# Altium PCB SmartTokens.PcbDoc
Units mm, origin at the board's own origin, x right, y up, seen from the top; angles counter-clockwise.
Board outline 22 x 21.98 mm, 4 copper layers (Component Side, Ground Plane, Power Plane, Solder Side), stack 1.1 mm thick; 43 components, 36 nets, 166 pads, 41 vias.
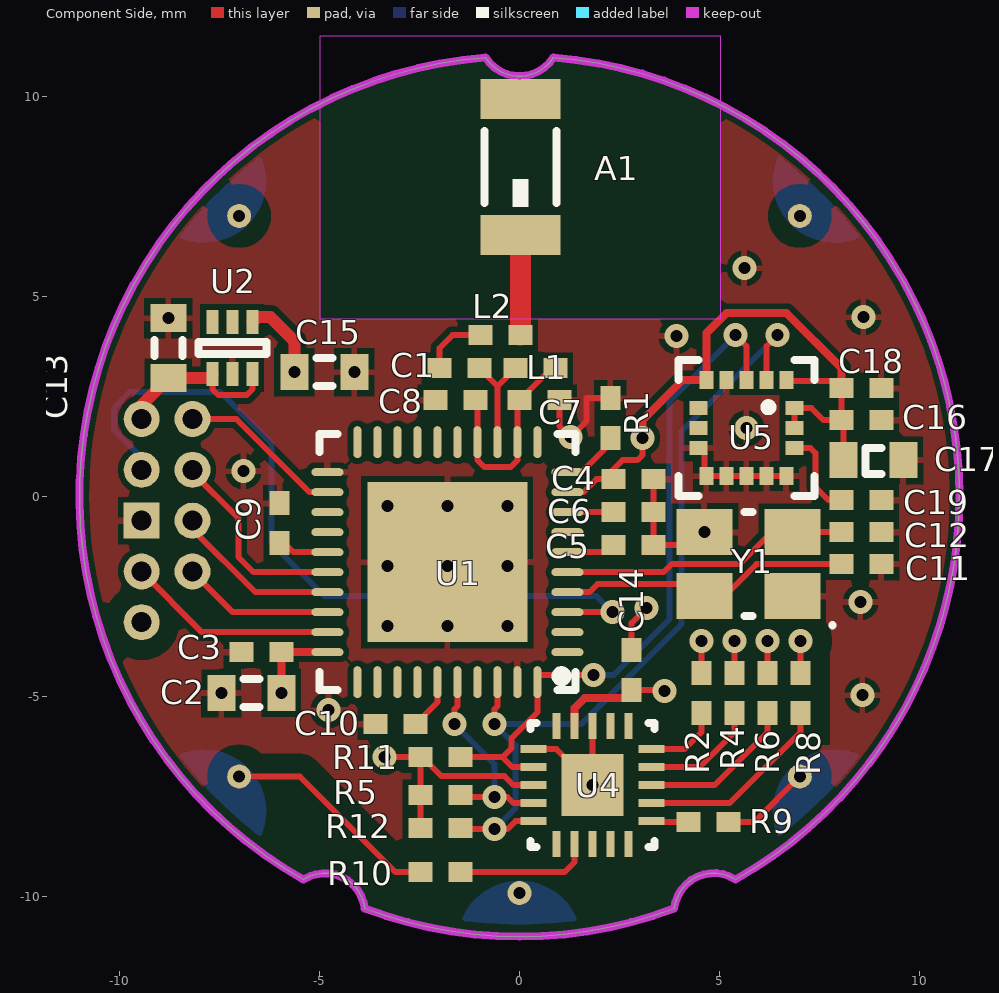
[diagram p0: Component Side view]
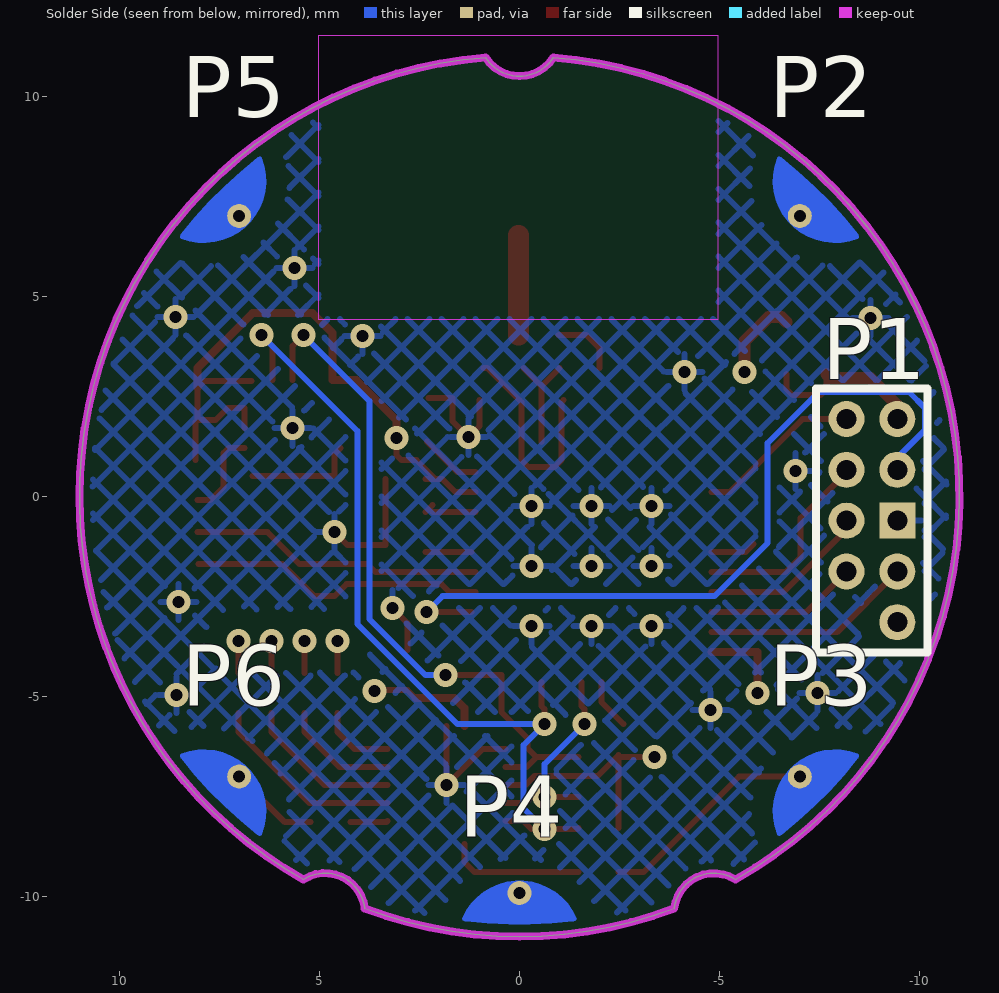
[diagram p1: Solder Side view, seen from below]
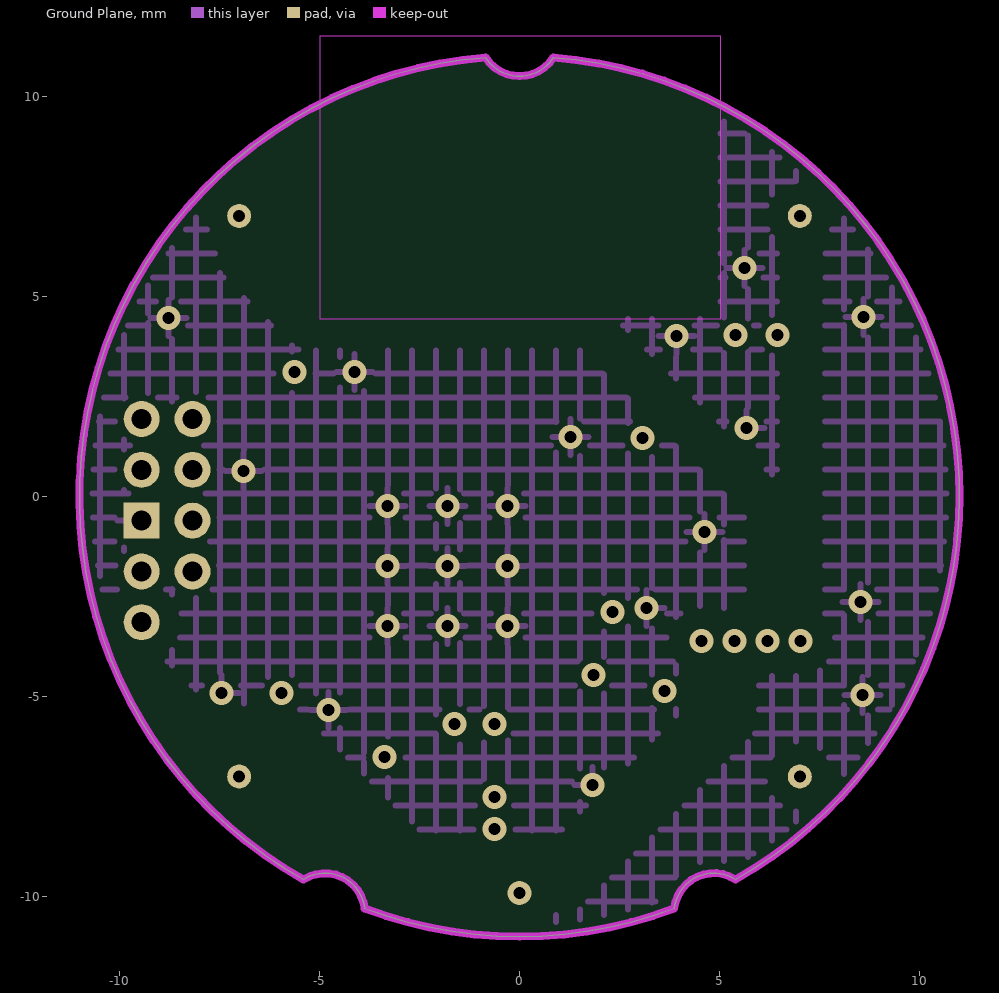
[diagram p2: Ground Plane]
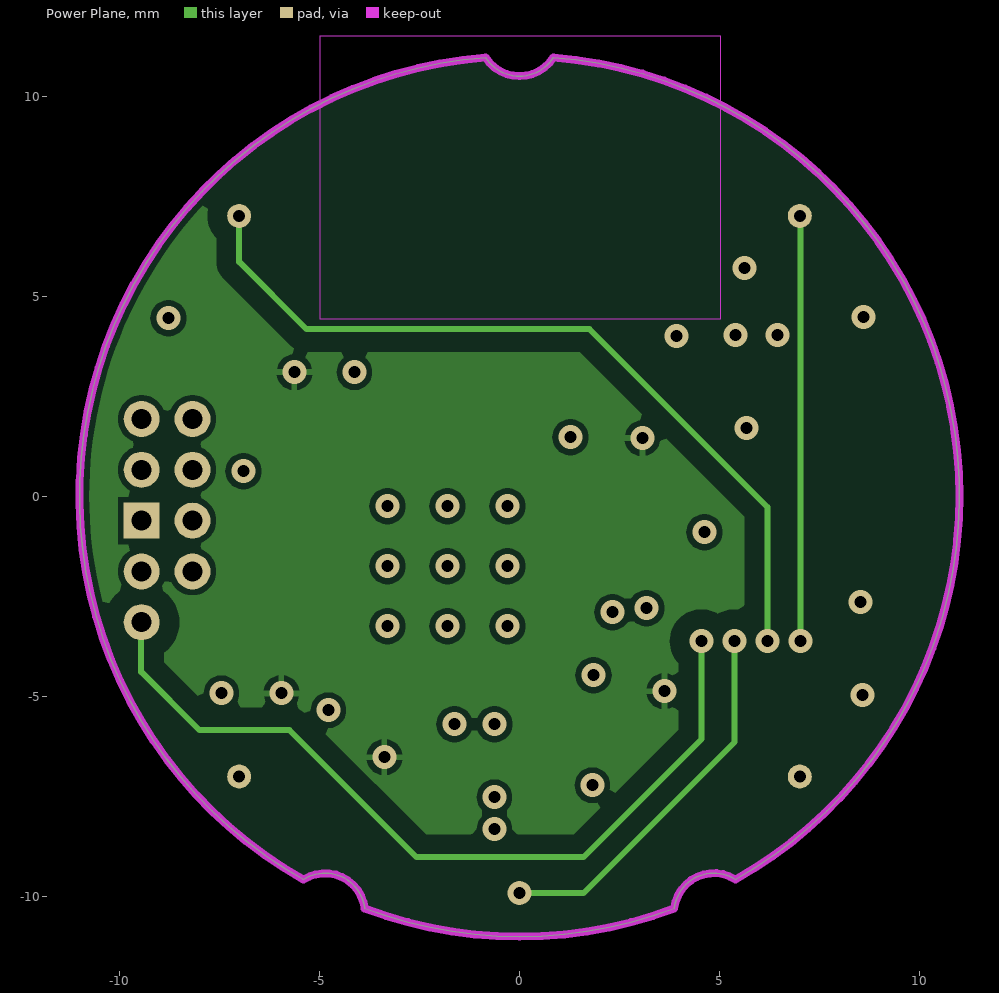
[diagram p3: Power Plane]

## Layer stack, top to bottom
Component Side: signal copper 0.035
Dielectric 1: prepreg 0.3, FR-4, Dk 4.2
Ground Plane: signal copper 0.035
Dielectric 3: prepreg 0.36, Dk 4.2
Power Plane: signal copper 0.035
Dielectric 2: prepreg 0.3, Dk 4.2
Solder Side: signal copper 0.035

## Board outline
-3.868,-10.307 ccw(c0,-0.01) 3.868,-10.307 3.868,-10.298 cw(c4.86,-10.423) 5.402,-9.583 5.402,-9.582 ccw(c0,0) 0.846,10.967 cw(c0,11.5) -0.846,10.967 ccw(c0,0) -5.402,-9.582 -5.402,-9.583 cw(c-4.86,-10.423)

## Design rules (kind name [scope] priority, off if disabled: settings)
Clearance Clearance_Electrodes [InNetClass('Electrodes') vs InPolygon] p1: gap=0.5
Clearance Clearance_Electrodes_1 [InNetClass('Electrodes') vs InPolygon] p2: gap=0.5
Clearance [All] p3: gap=0.15
ComponentClearance [All] p1: gap=0.15 collisioncheckmode=3 verticalgap=0.254 showdistances=FALSE
DiffPairsRouting [All] p1: maxlimit=10 minlimit=0.125 mostfreqgap=0.15 toplayer_minwidth=0.381 toplayer_maxwidth=0.381 toplayer_prefwidth=0.381 midlayer1_minwidth=0.381 midlayer1_maxwidth=0.381 midlayer1_prefwidth=0.381 midlayer2_minwidth=0.381 midlayer2_maxwidth=0.381 midlayer2_prefwidth=0.381 bottomlayer_minwidth=0.381 bottomlayer_maxwidth=0.381 bottomlayer_prefwidth=0.381 maxuncoupledlength=12.7
FabricationTestPointUsage FabricationTestPointUsage_1 [All] p1: valid=0 allowmultiple=FALSE
FabricationTestpoint FabricationTestpoint_1 [All] p1: side=3 testpointundercomponent=TRUE minsize=1.016 maxsize=2.54 preferedsize=1.524 minholesize=0 maxholesize=1.016 preferedholesize=0.813 testpointgrid=0.025 allowsidetop=TRUE allowsidebottom=TRUE usegrid=TRUE gridtolerance=0
HoleSize [All] p1: absolutevalues=TRUE maxlimit=6 minlimit=0.2 maxpercent=80.000 minpercent=20.000
HoleSize FabricationTestpoint [All] p2 off: absolutevalues=TRUE maxlimit=2.54 minlimit=0.025 maxpercent=80.000 minpercent=20.000
HoleSize FabricationTestPointUsage [All] p3 off: absolutevalues=TRUE maxlimit=2.54 minlimit=0.025 maxpercent=80.000 minpercent=20.000
MinimumSolderMaskSliver [All] p1: minsoldermaskwidth=0.01
PlaneClearance [All] p1: clearance=0.5
PlaneConnect [All] p1: planeconnectstyle=Relief reliefexpansion=0.4 reliefentries=4 reliefconductorwidth=0.15 reliefairgap=0.15
PolygonConnect PolygonConnect_Electrodes [InNetClass('Electrodes') vs isVia] p1: connectstyle=Direct reliefconductorwidth=0.254 reliefentries=4 polygonreliefangle="90 Angle" airgapwidth=0.254
PolygonConnect [All] p2: connectstyle=Relief reliefconductorwidth=0.15 reliefentries=4 polygonreliefangle="90 Angle" airgapwidth=0.15
RoutingCorners [All] p1: cornerstyle=45-Degree minsetback=1.25 maxsetback=1.25
RoutingVias [All] p1: holewidth=0.3 width=0.6 viastyle="Through Hole" minholewidth=0.3 minwidth=0.6 maxholewidth=0.3 maxwidth=0.6
SilkToBoardRegionClearance [All] p1 off:
SilkToSilkClearance [All] p1: silktosilkclearance=0.1
SilkToSolderMaskClearance [IsPad] p1: minsilkscreentomaskgap=0.1 clearancetoexposedcopper=TRUE
SolderMaskExpansion [All] p1: expansion=0.075
UnpouredPolygon [All] p1: allowunpoured=FALSE
Width [All] p1: maxlimit=10 minlimit=0.125 preferedwidth=0.2 toplayer_minwidth=0.15 toplayer_maxwidth=0.52 midlayer1_prefwidth=0.15 midlayer2_prefwidth=0.15 bottomlayer_minwidth=0.15 bottomlayer_maxwidth=0.52 minimp=50.000000 maximp=50.000000 favimp=50.000000
17 further rules are at their usual default settings.

## Classes and differential pairs
component class "SmartTokens Microcontroller": A1 C1 C2 C3 C4 C5 C6 C7 C8 C9 C10 C11 C12 L1 L2 P1 R1 U1 Y1
component class "SmartTokens Peripherals": C13 C14 C15 C16 C17 C18 C19 P2 P3 P4 P5 P6 R2 R4 R5 R6 R8 R9 R10 R11 R12 U2 U4 U5
net class Electrodes: BOTTOM_ELECTRODE NetP2_1 NetP2_2 NetP3_1 NetP4_1 NetP5_1 NetP6_1 NetR2_1 NetR4_1 NetR6_1 NetR8_1 NetR9_1 NetR10_1

## Components (designator, comment, footprint, x,y, rotation, side; value= is the part's Value field where it differs from the comment)
A1 "2450AT18A100" 2450AT18A100 0.025,8.225 r90 top
C1 "47pF 0402 NP0 50V ±5%" 0402 -1.5,3.2 r0 top
C2 "10uF 0603 X5R 6.3V ±20%" 0603 -6.7,-4.925 r0 top
C3 "100nF 0402 X7R 16V ±10%" 0402 -6.45,-3.9 r0 top
C4 "100nF 0402 X7R 16V ±10%" 0402 2.85,0.425 r180 top
C5 "100nF 0402 X7R 16V ±10%" 0402 2.85,-1.225 r180 top
C6 "10nF" 0402 2.85,-0.4 r180 top
C7 "47pF 0402 NP0 50V ±5%" 0402 0.5,2.4 r180 top
C8 "100nF 0402 X7R 16V ±10%" 0402 -1.6,2.4 r0 top
C9 "100nF 0402 X7R 16V ±10%" 0402 -6,-0.675 r270 top
C10 "100nF 0402 X7R 16V ±10%" 0402 -3.1,-5.7 r0 top
C11 "15pF 0402 NP0 50V ±5%" 0402 8.55,-1.7 r180 top
C12 "15pF 0402 NP0 50V ±5%" 0402 8.55,-0.9 r180 top
C13 "1uF" 0603 -8.775,3.7 r270 top
C14 "100nF 0402 X7R 16V ±10%" 0402 2.8,-4.35 r270 top
C15 "1uF" 0603 -4.875,3.1 r180 top
C16 "100nF 0402 X7R 16V ±10%" 0402 8.55,1.9 r180 top
C17 "10uF TANTALUM" 0603_POLARIZED 8.85,0.9 r0 top
C18 "100nF 0402 X7R 16V ±10%" 0402 8.55,2.7 r180 top
C19 "10nF" 0402 8.55,-0.1 r180 top
L1 "3.9NH  0402 MURATA" 0402 0.4,3.2 r0 top
L2 "5.1NH  0402 MURATA" 0402 -0.475,4.025 r180 top
P1 "HEADER 4X2+1 0.05\"" "HEADER 4X2+1 0.05\"" -8.81,-0.61 r270 bottom
P2 "TOUCH_ELECTRODE_PAD" TOUCH_ELECTRODES_PADS -7.786,7.786 r45 bottom
P3 "TOUCH_ELECTRODE_PAD" TOUCH_ELECTRODES_PADS -7.786,-7.786 r135 bottom
P4 "TOUCH_ELECTRODE_PAD" TOUCH_ELECTRODES_PADS 0,-11.02 r180 bottom
P5 "TOUCH_ELECTRODE_PAD" TOUCH_ELECTRODES_PADS 7.786,7.786 r315 bottom
P6 "TOUCH_ELECTRODE_PAD" TOUCH_ELECTRODES_PADS 7.786,-7.786 r225 bottom
R1 "43K 0402 1/16W ±1%" 0402 2.275,1.95 r270 top
R2 "10K 0402 1/16W ±1%" 0402 4.55,-4.925 r90 top
R4 "10K 0402 1/16W ±1%" 0402 5.375,-4.925 r90 top
R5 "100K 0402 1/16W ±1%" 0402 -1.975,-7.475 r180 top
R6 "10K 0402 1/16W ±1%" 0402 6.2,-4.925 r90 top
R8 "10K 0402 1/16W ±1%" 0402 7.025,-4.925 r90 top
R9 "10K 0402 1/16W ±1%" 0402 4.725,-8.15 r0 top
R10 "10K 0402 1/16W ±1%" 0402 -1.975,-9.4 r180 top
R11 "10K 0402 1/16W ±1%" 0402 -1.975,-6.525 r180 top
R12 "10K 0402 1/16W ±1%" 0402 -1.975,-8.3 r180 top
U1 "JN516X" QFN50P600X600X100_HS-41N -1.8,-1.65 r180 top
U2 "STLQ015XG33R" SOT666 -7.175,3.7 r90 top
U4 "AT42QT1070-MMH" QFN45P300X300X85_HS-21L 1.825,-7.225 r180 top
U5 "LSM6DS0" LGA300X300X86-16L 5.675,1.7 r0 top
Y1 "TSX-3225" TSX-3225 5.725,-1.7 r0 top

## Footprints (in the part's own frame and the unit in brackets; to place one, negate y for a bottom-side part, rotate by r counter-clockwise, add the part's x,y. Pads: shape width x height; smd on the part's side, far side on the other; paste and mask are expansions set on the pad)
0402 [mm] "Chip Body 1.0 x 0.5 mm (LxW typ)"
  rect 0.6x0.5 smd: 1(-0.5,0) 2(0.5,0)
  body extent -0.55,-0.3 0.55,0.3, height 0.55
0603 [mm] "Chip Body 1.6 x 0.8 mm (LxW typ)"
  rect 0.7x0.9 smd: 1(-0.75,0) 2(0.75,0)
  silkscreen extent -0.2,-0.35 0.2,0.35, body extent -0.85,-0.48 0.85,0.48, height 0.9
0603_POLARIZED [mm] "Chip Body 1.6 x 0.8 mm (LxW typ)"
  rect 0.7x0.9 smd: 1(-0.75,0) 2(0.75,0)
  silkscreen extent -0.2,-0.35 0.2,0.3, body extent -0.85,-0.48 0.85,0.48, height 0.9
2450AT18A100 [mm]
  rect 1x2 smd: 1(-1.7,0) 2(1.7,0)
  silkscreen extent -1,-0.9 0.9,0.9, body extent -1.7,-0.9 1.7,0.9, height 1.9
"HEADER 4X2+1 0.05\"" [mm]
  round 0.9 hole 0.5: 1(-2.54,0.635) 2(-1.27,0.635) 4(1.27,0.635) 5(-2.54,-0.635) 6(-1.27,-0.635) 7(0,-0.635) 8(1.27,-0.635) 9(2.54,0.635)
  rect 0.9x0.9 hole 0.5: 3(0,0.635)
  silkscreen extent -3.3,-1.4 3.3,1.4
LGA300X300X86-16L [mm] "LGA, 16-Leads, Body 3.00x3.00mm, Pitch 0.50mm, IPC High Density"
  rect 0.35x0.45 smd: 1(1,1.2) 2(0.5,1.2) 3(0,1.2) 4(-0.5,1.2) 5(-1,1.2) 9(-1,-1.2) 10(-0.5,-1.2) 11(0,-1.2) 12(0.5,-1.2) 13(1,-1.2)
  rect 0.45x0.35 smd: 6(-1.2,0.5) 7(-1.2,0) 8(-1.2,-0.5) 14(1.2,-0.5) 15(1.2,0) 16(1.2,0.5)
  silkscreen extent -1.7,-1.7 1.7,1.7, body extent -1.55,-1.55 1.55,1.55, height 0.86
QFN45P300X300X85_HS-21L [mm] "QFN, 20-Leads, Body 3.00x3.00mm, Pitch 0.45mm, Thermal Pad 1.55x1.55mm, IPC High Density"
  rect 0.65x0.2 smd: 1(-1.475,0.9) 2(-1.475,0.45) 3(-1.475,0) 4(-1.475,-0.45) 5(-1.475,-0.9) 11(1.475,-0.9) 12(1.475,-0.45) 13(1.475,0) 14(1.475,0.45) 15(1.475,0.9)
  rect 0.2x0.65 smd: 6(-0.9,-1.475) 7(-0.45,-1.475) 8(0,-1.475) 9(0.45,-1.475) 10(0.9,-1.475) 16(0.9,1.475) 17(0.45,1.475) 18(0,1.475) 19(-0.45,1.475) 20(-0.9,1.475)
  rect 1.55x1.55 smd: 21(0,0)
  silkscreen extent -1.55,-1.55 1.55,1.55, body extent -1.55,-1.55 1.55,1.55, height 0.85
QFN50P600X600X100_HS-41N [mm]
  oval 0.8x0.2 smd: 1(-3,2.25) 2(-3,1.75) 3(-3,1.25) 4(-3,0.75) 5(-3,0.25) 6(-3,-0.25) 7(-3,-0.75) 8(-3,-1.25) 9(-3,-1.75) 10(-3,-2.25) 21(3,-2.25) 22(3,-1.75) 23(3,-1.25) 24(3,-0.75) 25(3,-0.25) 26(3,0.25) 27(3,0.75) 28(3,1.25) 29(3,1.75) 30(3,2.25)
  oval 0.2x0.8 smd: 11(-2.25,-3) 12(-1.75,-3) 13(-1.25,-3) 14(-0.75,-3) 15(-0.25,-3) 16(0.25,-3) 17(0.75,-3) 18(1.25,-3) 19(1.75,-3) 20(2.25,-3) 31(2.25,3) 32(1.75,3) 33(1.25,3) 34(0.75,3) 35(0.25,3) 36(-0.25,3) 37(-0.75,3) 38(-1.25,3) 39(-1.75,3) 40(-2.25,3)
  rect 4x4 smd: 41(0,0)
  silkscreen extent -3.2,-3.2 3.2,3.2, body extent -3.05,-3.05 3.05,3.05, height 1
SOT666 [mm] "SOT666, 6-Leads, Body 1.60x1.60mm, Pitch 0.50mm, IPC High Density"
  rect 0.6x0.3 smd: 1(-0.65,0.5) 2(-0.65,0) 3(-0.65,-0.5) 4(0.65,-0.5) 5(0.65,0) 6(0.65,0.5)
  silkscreen extent -0.15,-0.85 0.15,0.85, body extent -0.65,-0.85 0.65,0.85, height 0.6
TOUCH_ELECTRODES_PADS [mm]
  round 0.6 hole 0.3 paste+0 mask+0: 1(0,1.1)
  Component Side region: -1.377,0.408 -1.363,0.398 -1.347,0.393 -1.347,0.393 0,0.311 1.347,0.393 1.347,0.393 1.363,0.398 1.377,0.408 1.377,0.408 1.402,0.415 1.42,0.433 1.426,0.458 1.426,0.458 1.425,0.468 1.422,0.478 1.422,0.478 1.422,0.478 0.995,1.05 0.357,1.37 -0.357,1.37 -0.995,1.05 -1.422,0.478 -1.422,0.478 -1.422,0.478 -1.426,0.454 -1.418,0.431 -1.4,0.414 -1.377,0.408
TSX-3225 [mm]
  rect 1.4x1.15 smd: 1(-1.1,-0.8) 2(1.1,-0.8) 3(1.1,0.8) 4(-1.1,0.8)
  silkscreen extent -0.1,-1.53 2.1,1.3, body extent -1.6,-1.25 1.6,1.25, height 1.9

## Part data
A1: "JOHANSON TECHNOLOGY  2450AT18A100E  ANTENNA, CERAMIC, 2.45GHZ"
C1 C7: library part 47pF
C2: library part "10uF (cheap)"
C3 C4 C5 C8 C9 C10 C14 C16 C18: library part "100nF (cheap)"
C6 C19: "10nF 0402 X7R 25V ±5%"
C11 C12: library part 15pF
C13 C15: "1uF 0603 X5R 10V ±10%"
C17: "10uF 0603 TANTALUM 10V ±20%"
L1: library part "3.9NH 0402 ±0.1NH", "MURATA - LQP15MN3N9B02D - 3.9NH ±0.1NH 0402"
L2: library part "5.1NH 0402 ±0.1NH", "MURATA - LQP15MN5N1B02D - 5.1NH ±0.1NH 0402"
P2 P3 P4 P5 P6: "Copper Pad to solder Touch Electrode"
R1: library part 43K
R2 R4 R6 R8 R9 R10 R11 R12: library part 10K
R5: library part 100K
U1: "IEEE802.15.4 Wireless Microcontroller"
U2: "STMicroelectronics 150 mA ultra low quiescent current linear voltage regulator"
U4: "Atmel Seven-channel QTouch® Touch Sensor IC"
U5: "STMicroelectronics iNEMO inertial module:   3D accelerometer and 3D gyroscope"
Y1: "EPSON - TSX-3225, 32MHZ, 10PPM, 9PF - CRYSTAL, TSX-3225, 32MHZ, 10PPM, 9PF"

## Via types
v1: diameter 0.6, hole 0.3, Component Side to Solder Side, 41 vias

## Nets (pads, with @x,y where several pads share a name; then routed paths per layer and width w, separated by ;. In a path a pad name is that pad's centre, name@x,y a point inside that pad or via, vN(x,y) a via of type N, cw(c..) or ccw(c..) an arc to the next point about the centre after c; other vN are vias at no path point)
+3.3V: C2.2 C3.2 C4.2 C14.2 C15.2 C16.2 C17.1 C18.2 R5.2 R11.2 R12.2 U1.9 U1.30 U2.4 U4.9 U4.13 U5.1 U5.5 U5.15 U5.16 | length 29.4
  Component Side w0.15: v1(-3.375,-6.525) R11.2 ; R12.2 R5.2 R11.2 ; U4.13 -0.149,-7.225 -0.374,-7 -0.842,-7 -1.95,-7 -2.475,-6.475 R11.2 ; U1.9@1.1,0.1 1.6,0.1 1.925,0.425 C4.2 ; C4.2@2.1,0.425 2.575,0.9 2.95,0.9 3.075,1.025 v1(3.075,1.45) ; C14.2@2.6,-5.05 C14.2 3.6,-4.85 v1(3.625,-4.875) ; U5.1@6.7,2.875 7.875,2.875 C18.2 C16.2 ; U5.15 U5.16 7.3,2.2 7.6,1.9 C16.2 ; C17.1 8.1,1.85 C16.2
  Component Side w0.2: v1(-5.95,-4.925) C3.2 U1.30 ; U4.9 1.375,-5.3 1.625,-5.05 C14.2@2.6,-5.05 ; v1(3.075,1.45) 3.075,1.9 4.075,2.9 U5.5 4.675,4.078 5.172,4.575 6.678,4.575 8.05,3.203 C18.2
  Component Side w0.3: U2.4 -6.55,4.475 -6.225,4.475 -5.625,3.875 v1(-5.625,3.1)
BOTTOM_ELECTRODE: P1.9 R2.2 | length 21.6
  Component Side w0.15: R2.2 v1(4.55,-3.625)
  Power Plane w0.15: P1.9@-9.46,-3.15 -9.46,-4.39 -8,-5.85 -5.75,-5.85 -2.575,-9.025 1.6,-9.025 4.55,-6.075 v1(4.55,-3.625)
GND: C2.1 C3.1 C4.1 C5.1 C6.1 C7.1 C8.1 C9.1 C10.1 C11.1 C12.1 C13.1 C14.1 C15.1 C16.1 C17.2 C18.1 C19.1 P1.3 R1.1 U1.21 U1.39 U1.41 U2.2 U4.8 U4.11 U4.21 U5.4 U5.8 U5.9 U5.10 U5.11 U5.12 U5.13 Y1.2 Y1.4 | length 13.2
  Component Side w0.15: U4.11 0.925,-6.325 v1(1.825,-7.225) U4.8 ; C7.1 1,1.75 v1(1.275,1.475) 1.675,1.875 1.675,2.45 R1.1 ; C14.1 2.8,-3.175 v1(3.175,-2.8) ; C4.1 C6.1 C5.1 4.3,-1.225 v1(4.625,-0.9) ; U5.8 4.625,1.05 4.625,0.55 U5.9 U5.10 U5.11 U5.12 U5.13
  other v1: -4.775,-5.35 8.575,-4.975 -7.45,-4.925 -3.3,-3.25 -1.8,-3.25 -0.3,-3.25 8.525,-2.65 -3.3,-1.75 -1.8,-1.75 -0.3,-1.75 -3.3,-0.25 -1.8,-0.25 -0.3,-0.25 -6.9,0.625 5.675,1.7 -4.125,3.1 3.925,4 -8.775,4.45 8.6,4.475 5.625,5.7
I2C.SCL: R12.1 U1.38 U4.15 U5.2 | length 21.2
  Component Side w0.15: R12.1 -1.45,-8.325 v1(-0.625,-8.325) -0.3,-8.325 -0.1,-8.125 U4.15 ; v1(-0.625,-5.7) -0.625,-5.325 -0.55,-5.25 U1.38 ; U5.2 6.175,3.75 v1(6.45,4.025)
  Solder Side w0.15: v1(-0.625,-8.325) -0.1,-7.8 -0.1,-6.225 v1(-0.625,-5.7) 1.549,-5.7 4.05,-3.199 4.05,1.625 v1(6.45,4.025)
I2C.SDA: R11.1 U1.40 U4.12 U5.3 | length 17.2
  Component Side w0.15: R11.1 -0.425,-6.525 ; U4.12 -0.175,-6.775 -0.425,-6.525 ; v1(1.85,-4.475) 0.65,-4.475 0.45,-4.475 U1.40 0.45,-5.4 -0.2,-6.05 -0.2,-6.3 -0.425,-6.525 ; v1(5.4,4.025) 5.675,3.75 U5.3
  Solder Side w0.15: v1(1.85,-4.475) 2.35,-4.475 3.75,-3.075 3.75,2.375 v1(5.4,4.025)
IBIAS: R1.2 U1.10 | length 1.5
  Component Side w0.15: U1.10@1.1,0.6 1.55,0.6 R1.2@2.312,1.363
NetA1_1: A1.1 L2.1 | length 2.5
  Component Side w0.52: L2.1 A1.1
NetC1_1: C1.1 L2.2 | length 1.7
  Component Side w0.15: C1.1 -2,3.7 -1.675,4.025 L2.2
NetC1_2: C1.2 L1.1 U1.13 | length 2.7
  Component Side w0.15: C1.2 -0.55,2.75 ; U1.13 -0.55,2.75 ; L1.1 -0.55,2.75
NetC19_2: C19.2 U5.14 | length 2.2
  Component Side w0.15: U5.14 7.275,1.2 7.4,1.075 7.4,0.225 7.725,-0.1 C19.2
NetP2_1: P2.1 R6.2 | length 21
  Component Side w0.15: R6.2 v1(6.2,-3.625)
  Power Plane w0.15: P2.1 -7.008,5.858 -5.325,4.175 1.75,4.175 6.2,-0.275 v1(6.2,-3.625)
NetP3_1: P3.1 R10.2 | length 5.5
  Component Side w0.15: P3.1 -5.492,-7.008 -3.1,-9.4 R10.2
NetP4_1: P4.1 R4.2 | length 10.3
  Component Side w0.15: R4.2 v1(5.375,-3.625)
  Power Plane w0.15: P4.1 1.605,-9.92 5.375,-6.15 v1(5.375,-3.625)
NetP5_1: P5.1 R8.2 | length 11.4
  Component Side w0.15: R8.2 v1(7.025,-3.625)
  Power Plane w0.15: v1(7.025,-3.625) P5.1@7.025,6.991
NetP6_1: P6.1 R9.2 | length 2.3
  Component Side w0.15: R9.2 5.866,-8.15 P6.1
NetR2_1: R2.1 U4.5 | length 1.9
  Component Side w0.15: U4.5 4.125,-6.325 4.55,-5.9 R2.1
NetR4_1: R4.1 U4.4 | length 2.9
  Component Side w0.15: U4.4 4.5,-6.775 5.375,-5.9 R4.1
NetR6_1: R6.1 U4.3 | length 3.9
  Component Side w0.15: U4.3 4.875,-7.225 6.2,-5.9 R6.1
NetR8_1: R8.1 U4.2 | length 4.9
  Component Side w0.15: U4.2 5.25,-7.675 7.025,-5.9 R8.1
NetR9_1: R9.1 U4.1 | length 0.9
  Component Side w0.15: U4.1 3.325,-8.15 R9.1
NetR10_1: R10.1 U4.17 | length 3.4
  Component Side w0.15: R10.1 -1.475,-9.395 1.13,-9.395 1.375,-9.15 U4.17
PROG_CTS: P1.7 U1.27 | length 4.2
  Component Side w0.15: P1.7@-8.19,-0.61 -8.19,-0.81 -6.6,-2.4 U1.27
PROG_MISO: P1.5 U1.22 | length 4.1
  Component Side w0.15: P1.5@-8.19,1.93 -7.08,1.93 -5.25,0.1 U1.22
PROG_RTS: P1.6 U1.26 | length 5
  Component Side w0.15: P1.6@-8.19,0.66 -8.19,0.615 -7.025,-0.55 -7.025,-1.525 -6.65,-1.9 U1.26
PROG_RXD: P1.8 U1.28 | length 3.8
  Component Side w0.15: P1.8@-8.19,-1.88 -7.17,-2.9 U1.28
PROG_TXD: P1.4 U1.29 | length 5.3
  Component Side w0.15: P1.4@-9.46,-1.88 -7.94,-3.4 U1.29
R\S\T\: P1.2 U1.3 | length 19.3
  Component Side w0.15: U1.3 v1(2.325,-2.9)
  Solder Side w0.15: P1.2@-9.46,0.66 -9.46,0.975 -10.135,1.65 -10.135,2.21 -9.74,2.605 -7.48,2.605 -6.2,1.325 -6.2,-1.175 -4.875,-2.5 1.925,-2.5 v1(2.325,-2.9)
T\O\U\C\H\_\C\H\G\: R5.1 U1.36 U4.14 | length 5.2
  Component Side w0.15: v1(-1.625,-5.7) -1.625,-5.325 -1.55,-5.25 U1.36 ; R5.1@-1.475,-7.525 v1(-0.625,-7.525) -0.3,-7.525 -0.15,-7.675 U4.14
  Solder Side w0.15: v1(-1.625,-5.7) -0.625,-6.7 v1(-0.625,-7.525)
VB_DIG: C10.2 U1.35 | length 1.3
  Component Side w0.15: C10.2 -2.05,-5.15 U1.35
VB_RAM: C9.2 U1.25 | length 1.1
  Component Side w0.15: C9.2@-5.85,-1.2 -5.65,-1.4 U1.25
VB_RF: C7.2 C8.2 L1.2 U1.12 U1.14 | length 5.4
  Component Side w0.15: C8.2 -1.05,2.35 -1.05,0.9 -0.875,0.725 -0.225,0.725 -0.05,0.9 U1.12 -0.05,2.35 C7.2 0.8,3.2 L1.2
VB_SYNTH: C5.2 U1.6 | length 1.1
  Component Side w0.15: U1.6 C5.2@2.35,-1.4
VB_VCO: C6.2 U1.8 | length 1.3
  Component Side w0.15: U1.8@1.1,-0.4 C6.2@2.175,-0.4 ; C6.2@2.175,-0.225 C6.2
VIN: C13.2 P1.1 U2.1 U2.3 | length 4.3
  Component Side w0.15: U2.1 -7.675,2.675 -7.525,2.525 -6.825,2.525 -6.675,2.675 U2.3
  Component Side w0.3: P1.1@-9.46,1.93 -9.46,2.265 C13.2 -7.775,2.95 U2.1
X1_32MHZ: C11.2 U1.4 Y1.1 | length 7.5
  Component Side w0.15: U1.4@1.1,-2.4 1.55,-2.4 1.75,-2.4 1.95,-2.2 4.325,-2.2 Y1.1 5.125,-2.5 5.925,-1.7 C11.2@8.025,-1.7
X2_32MHZ: C12.2 U1.5 Y1.3 | length 7.4
  Component Side w0.15: U1.5@1.1,-1.9 U1.5 3.6,-1.9 3.8,-1.7 5.05,-1.7 5.5,-1.7 6.3,-0.9 Y1.3 C12.2
pads on no net: A1.2 U1.1 U1.2 U1.7 U1.11 U1.15 U1.16 U1.17 U1.18 U1.19 U1.20 U1.23 U1.24 U1.31 U1.32 U1.33 U1.34 U1.37 U2.5 U2.6 U4.6 U4.7 U4.10 U4.16 U4.18 U4.19 U4.20 U5.6 U5.7

## Polygon pours and split planes (outlines as drawn)
GND on Solder Side "Bottom Ground Plane" (hatched 45Degree grid 0.6 track 0.15, remove dead copper, pour order 13): -3.868,-10.307 ccw(c0,-0.01) 3.868,-10.307 3.868,-10.298 cw(c4.86,-10.423) 5.402,-9.583 5.402,-9.582 ccw(c0,0) 0.846,10.967 cw(c0,11.5) -0.846,10.967 ccw(c0,0) -5.402,-9.582 -5.402,-9.583 cw(c-4.863,-10.428)
GND on Component Side "Top Ground Plane" (solid, remove dead copper, pour order 12): -3.868,-10.307 ccw(c0,-0.01) 3.868,-10.307 3.868,-10.298 cw(c4.86,-10.423) 5.402,-9.583 5.402,-9.582 ccw(c0,0) 0.846,10.967 cw(c0,11.5) -0.846,10.967 ccw(c0,0) -5.402,-9.582 -5.402,-9.583 cw(c-4.863,-10.428)
no net on Keep-Out Layer "Bottom Ground Plane" (none): -3.868,-10.307 ccw(c0,-0.01) 3.868,-10.307 3.868,-10.298 cw(c4.86,-10.423) 5.402,-9.583 5.402,-9.582 ccw(c0,0) 0.846,10.967 cw(c0,11.5) -0.846,10.967 ccw(c0,0) -5.402,-9.582 -5.402,-9.583 cw(c-4.863,-10.428)
GND on Ground Plane "Inner Ground Plane" (hatched 90Degree grid 0.6 track 0.15, remove dead copper, pour order 9): -3.868,-10.307 ccw(c0,-0.01) 3.868,-10.307 3.868,-10.298 cw(c4.86,-10.423) 5.402,-9.583 5.402,-9.582 ccw(c0,0) 0.846,10.967 cw(c0,11.5) -0.846,10.967 ccw(c0,0) -5.402,-9.582 -5.402,-9.583 cw(c-4.863,-10.428)
+3.3V on Power Plane "Inner Power Plane" (solid, remove dead copper, pour order 10): -3.868,-10.307 ccw(c0,-0.01) 3.868,-10.307 3.868,-10.298 cw(c4.86,-10.423) 5.402,-9.583 5.402,-9.582 ccw(c0,0) 0.846,10.967 cw(c0,11.5) -0.846,10.967 ccw(c0,0) -5.402,-9.582 -5.402,-9.583 cw(c-4.863,-10.428)

## Keep-outs
Keep-Out Layer:
  pour cut-out: 5.025,4.425 -4.975,4.425 -4.975,11.508 5.025,11.508

## Other copper
Ground Plane:
  pour cut-out: -9.875,-4.748 -8.415,-6.208 ccw(c-7.99,-5.784) -7.99,-6.384 -6.139,-6.384 -3.14,-9.383 ccw(c-2.715,-8.959) -2.715,-9.559 -0.513,-9.559 ccw(c0.01,-9.854) 0.01,-10.454 1.139,-10.454 ccw(c1.139,-9.854) 1.564,-10.279 5.809,-6.033 ccw(c5.385,-5.609) 5.985,-5.609 5.985,-4.115 ccw(c6.21,-3.559) 6.622,-3.995 ccw(c7.035,-3.559) 7.635,-3.559 7.635,7.057 ccw(c7.035,7.057) 7.459,7.481 7.442,7.499 ccw(c7.017,7.074) 6.434,6.931 6.434,0.416 2.184,4.666 ccw(c1.76,4.241) 1.76,4.842 -5.067,4.842 -6.398,6.173 -6.398,7.074 ccw(c-6.998,7.074) -7.599,7.074 -7.599,5.924 ccw(c-6.998,5.924) -7.423,5.5 -5.74,3.817 ccw(c-5.315,4.241) -5.315,3.641 1.511,3.641 5.609,-0.457 5.609,-3.002 ccw(c5.385,-3.559) 4.972,-3.122 ccw(c4.56,-3.559) 3.959,-3.559 3.959,-5.435 1.036,-8.358 -2.467,-8.358 -5.466,-5.359 ccw(c-5.89,-5.784) -5.89,-5.183 -7.742,-5.183 -8.85,-4.075 -8.85,-3.084 ccw(c-9.45,-3.084) -10.051,-3.084 -10.051,-4.324 ccw(c-9.45,-4.324)

## Silkscreen, mask and mechanical layers (free items; w line width, h text height)
Board Outline:
  lines w0.1: -5.402,-9.583 cw(c-4.86,-10.423) -3.868,-10.298 ; -5.402,-9.582 cw(c0,0) -0.846,10.967 ccw(c0,11.5) 0.846,10.967 cw(c0,0) 5.402,-9.582 ; -3.868,-10.307 ccw(c0,-0.01) 3.868,-10.307 ; 3.868,-10.298 cw(c4.86,-10.423) 5.402,-9.583